# EAGLE board PowerSupply (EAGLE 7.1.0)
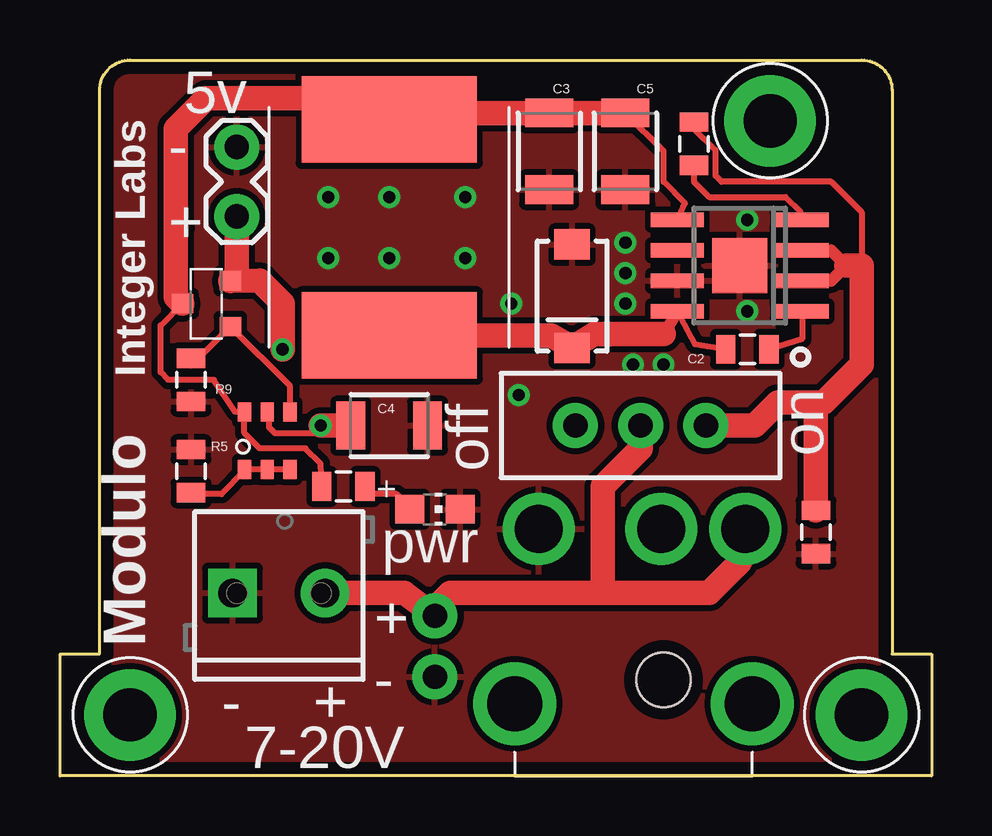
[diagram p0: board, top side]
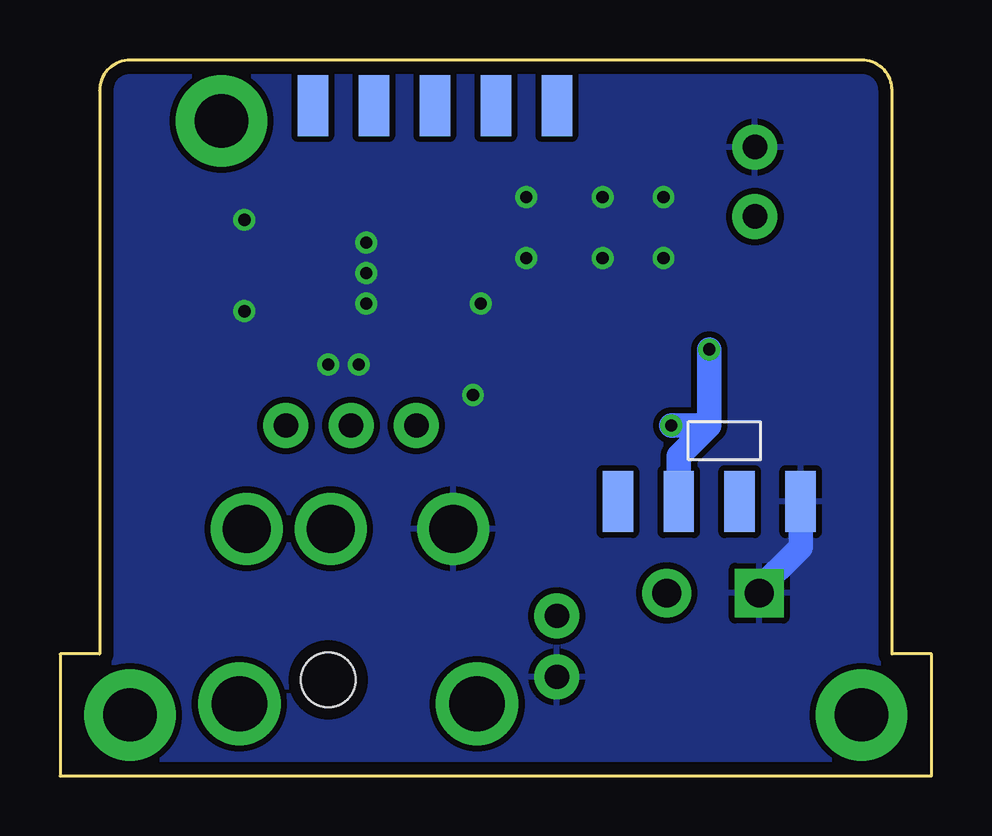
[diagram p1: board, bottom side, seen from below]

Size 36.32 x 29.84 mm. Coordinates in mm from the lower left corner, seen from the top.
Copper layers (1*16): Top 0.0178mm / dielectric 59mil / Bottom 0.0178mm
Design rules "SSC-EAGLE-2Lyr_v1.0.0.3": minimum track width 6mil, minimum drill 14mil, track to track 6mil, track to pad 6mil, pad to pad 6mil, via to via 6mil, smd to smd 6mil, copper to edge 20mil, drill to drill 16mil, minimum pad ring 8mil, minimum via ring 8mil, stop-mask expansion 3mil, vias tented up to drill 0mil, thermal gap 10mil

## Footprints (pad centres in the part's own frame; a part is rotated, then mirrored left to right if it is on the bottom)
0805 = smd 0.8 x 1.2: 1 -0.9,0; 2 0.9,0
1210 = smd 1.2 x 2: 1 -1.6,0; 2 1.6,0
SMA-DIODE = smd 1.27 x 1.47: A -2.15,0; C 2.15,0
1X02_NO_SILK = drill 1.016 pad 1.88: 1 0,0; 2 2.54,0
1X02_LOCK = drill 1.016 pad 1.88: 1 -0.178,0; 2 2.718,0
SCREWTERMINAL-3.5MM-2_LOCK = drill 1.2 pad 2.032 square: 1 -0.178,0 | drill 1.2 pad 2.032: 2 3.678,0
INDUCTOR-VLF10040 = smd 3.6 x 7.3: P$1 -4.5,0; P$2 4.5,0
CHIP-LED0805 = smd 1.2 x 1.2: A 0,-1.05; C 0,1.05
SOT-26 = smd 0.55 x 0.8: 1 -0.95,-1.2; 2 0,-1.2; 3 0.95,-1.2; 4 0.95,1.2; 5 0,1.2; 6 -0.95,1.2
MICRO3 = smd 0.8 x 0.9: 1 -0.95,-1; 2 0.95,-1; 3 0,1
SWITCH-SPDT_LOCK.007S = drill 1.016 pad 1.88: 1 0,2.718; 2 0,0; 3 0,-2.718
SOIC8-EP = smd 0.6 x 2.2: 1 -1.905,-2.6; 2 -0.635,-2.6; 3 0.635,-2.6; 4 1.905,-2.6; 5 1.905,2.6; 6 0.635,2.6; 7 -0.635,2.6; 8 -1.905,2.6 | smd 2.286 x 2.286: EP 0,0
FOOTPRINT2 = smd 1.27 x 2.54 bottom: BUS0 5.08,11.43; BUS1 7.62,11.43; BUS2 10.16,11.43; BUS3 12.7,11.43; PROG0 15.24,27.94; PROG1 17.78,27.94; PROG2 20.32,27.94; PROG3 22.86,27.94; PROG4 25.4,27.94 | drill 2.223 pad 3.81: P$1 2.54,2.54; P$2 33.02,2.54; P$3 29.21,27.305
DC-POWER-JACK-LOWPRO = drill 2: 1 10.3,-3.4; 2 10.3,5.2; 3 10.3,0.1 | drill 2.3: S1 3,6.2; S2 3,-3.7 | hole 2.26: 4,0

## Placement (x,y rotation side)
C1  10uF 25V  [0805]  31.5,10.16 270 top
C2  .1uF  [0805]  28.64,17.78 180 top
C3  47uF  [1210]  20.38,26.04 270 top
C4  47uF  [1210]  13.72,14.61 0 top
C5  47uF  [1210]  23.56,26.04 270 top
D1  ssa33l  [SMA-DIODE]  21.34,20 270 top
JP1  M021X02_NO_SILK  [1X02_NO_SILK]  15.62,4.13 90 top
JP2  M02LOCK  [1X02_LOCK]  7.37,26.04 270 top
JP5  M023.5MM_LOCK  [SCREWTERMINAL-3.5MM-2_LOCK]  7.37,7.62 0 top
L1  15uH  [INDUCTOR-VLF10040]  13.72,22.86 90 top
LED1  [CHIP-LED0805]  15.62,11.11 270 top
Q2  DMMT5401  [SOT-26]  8.64,13.97 0 top
Q3  DMG2305UX  [MICRO3]  6.1,19.68 90 top
R1  100k  [0805]  26.42,26.35 270 top
R2  680  [0805]  11.81,12.06 180 top
R5  10k 1%  [0805]  5.46,12.7 270 top
R9  47k 1%  [0805]  5.46,16.51 90 top
S2  [SWITCH-SPDT_LOCK.007S]  24.19,14.61 90 top
U$3  ADP2303  [SOIC8-EP]  28.32,21.27 90 top
U$4  FOOTPRINTFOOTPRINT-2  [FOOTPRINT2]  0.38,0 0 top
U$21  DC-JACKLOWPRO  [DC-POWER-JACK-LOWPRO]  25.15,0 90 top

## Library data of the parts
C1-C5 = SparkFun-Capacitors
D1 = SparkFun-DiscreteSemi
JP1 JP2 JP5 = SparkFun-Connectors
L1 Q2 U$3 U$21 = IntegerLabs
LED1 = adafruit
Q3 = transistor-power
R1 = SparkFun-Resistors
R2 R5 R9 = SparkFun-Passives
S2 = SparkFun-Electromechanical
U$4 = IntegerLabs; BOARD: Power Supply; VERSION: v2

## Nets
GND: C1.2 C3.2 C4.2 C5.2 D1.A JP1.1 JP2.1 JP5.1 LED1.C R5.1 R9.1 U$3.7 U$3.EP U$4.BUS0 U$21.2
N$2: JP1.2 JP5.2 S2.2 U$21.1
N$6: R1.2 U$3.4
N$8: LED1.A R2.1
N$11: C2.1 U$3.1
N$14: Q2.1 Q2.2 Q2.3 R5.2
N$16: Q2.4 Q3.1 R9.2
VCC: C4.1 JP2.2 Q2.5 Q3.2 U$4.BUS2
VIN: C1.1 R1.1 S2.3 U$3.2 U$3.3
VOUT: C2.2 D1.C L1.P$1 U$3.8
VREG: C3.1 C5.1 L1.P$2 Q2.6 Q3.3 R2.2 U$3.5

## Tracks (layer width: path | path; a pad name or v marks a point on that pad's centre or on a via)
GND  (via drill 0.51)
  Bottom 1.016: 7.37,7.62 5.46,9.53 U$4.BUS0
  other vias: 18.8,19.68 19.11,15.88 25.15,17.14 23.88,17.14 28.64,23.18 13.72,24.13 13.72,21.59 11.18,24.13 11.18,21.59 28.64,19.37 23.56,22.23 23.56,20.95 23.56,19.68 16.89,24.13 16.89,21.59
  pour Top (isolate 0.254): -0.89,-1.27 37.85,-1.27 37.85,30.48 -0.89,30.48
  pour Bottom (isolate 0.254): -0.89,0 -0.89,30.48 37.21,30.48 37.21,0
N$2
  Top 1.016: JP5.2 14.35,7.62 JP1.2 15.62,6.99 16.26,7.62 22.61,7.62 | 22.61,7.62 27.05,7.62 28.32,8.89 28.32,10.07 U$21.1 | S2.2 24.19,13.65 22.61,12.06 22.61,7.62
N$6
  Top 0.254: R1.2 26.42,24.77 27.05,24.13 30.23,24.13 30.86,23.5 30.86,23.24 U$3.4
N$8
  Top 0.254: LED1.A 14.35,11.43 14.03,11.75 13.03,11.75 R2.1
N$11
  Top 0.254: U$3.1 30.92,18.21 C2.1
N$14
  Top 0.254: Q2.3 Q2.2 Q2.1 7.69,12.7 6.73,11.75 5.51,11.75 R5.2
N$16
  Top 0.254: Q2.4 9.59,16.25 Q3.1 5.46,17.1 R9.2
VCC  (via drill 0.51)
  Top 0.254: Q2.5 8.71,15.17 8.71,14.54 8.95,14.29 11.18,14.29 v10.86,14.61
  Top 1.016: v9.27,17.78 9.27,19.68 8.32,20.64 Q3.2 7.37,20.91 JP2.2 | C4.1 v10.86,14.61
  Bottom 1.016: v9.27,17.78 9.27,14.61 | 9.27,14.61 10.54,13.34 U$4.BUS2 | 9.27,14.61 v10.86,14.61
VIN
  Top 0.254: 33.4,21.27 33.4,23.5 32.13,24.77 27.57,24.77 27.32,25.02 27.32,26.09 26.42,26.99 R1.1 | U$3.3 32.13,21.91 | U$3.2 32.13,20.64
  Top 0.508: 32.13,21.91 32.77,21.27 32.13,20.64
  Top 1.016: 32.77,21.27 33.4,21.27 33.4,17.14 31.81,15.56 31.5,15.56 | S2.3 28.96,14.61 29.91,15.56 31.5,15.56 | C1.1 31.5,15.56
VOUT
  Top 0.254: C2.2 26.47,17.98 U$3.8
  Top 0.508: U$3.8 25.15,18.41
  Top 1.016: 25.15,18.41 22.27,18.41 D1.C 20.46,18.36 L1.P$1
VREG
  Top 0.254: Q3.3 4.19,18.78 4.19,16.83 4.51,16.51 6.41,16.51 7.3,15.17 Q2.6 7.68,14.29 8.32,13.65 10.22,13.65 10.86,13.02 R2.2 | U$3.5 26.04,23.87 25.15,24.77 25.15,26.05 C5.1
  Top 0.508: 5.01,23.36 4.9,23.07 | 4.9,23.07 4.83,22.86 | 5.11,22.86 4.9,23.07
  Top 1.016: Q3.3 4.83,19.95 4.83,22.86 4.83,26.99 6.1,28.26 13.72,28.26 L1.P$2 14.63,27.95 14.94,27.64 C3.1 C5.1

## Text on the board
tPlace: 5v | - | + | off | on | pwr | + | - | - | + | 7-20V